# Altium PCB SPLCD V2.0.PcbDoc (part 2 of 2)
Units mm, origin at the board's own origin, x right, y up, seen from the top; angles counter-clockwise.
Board outline 130.07 x 120.05 mm, 4 copper layers (TopLayer, GND, PWR, BottomLayer); 221 components, 137 nets, 665 pads, 261 vias.
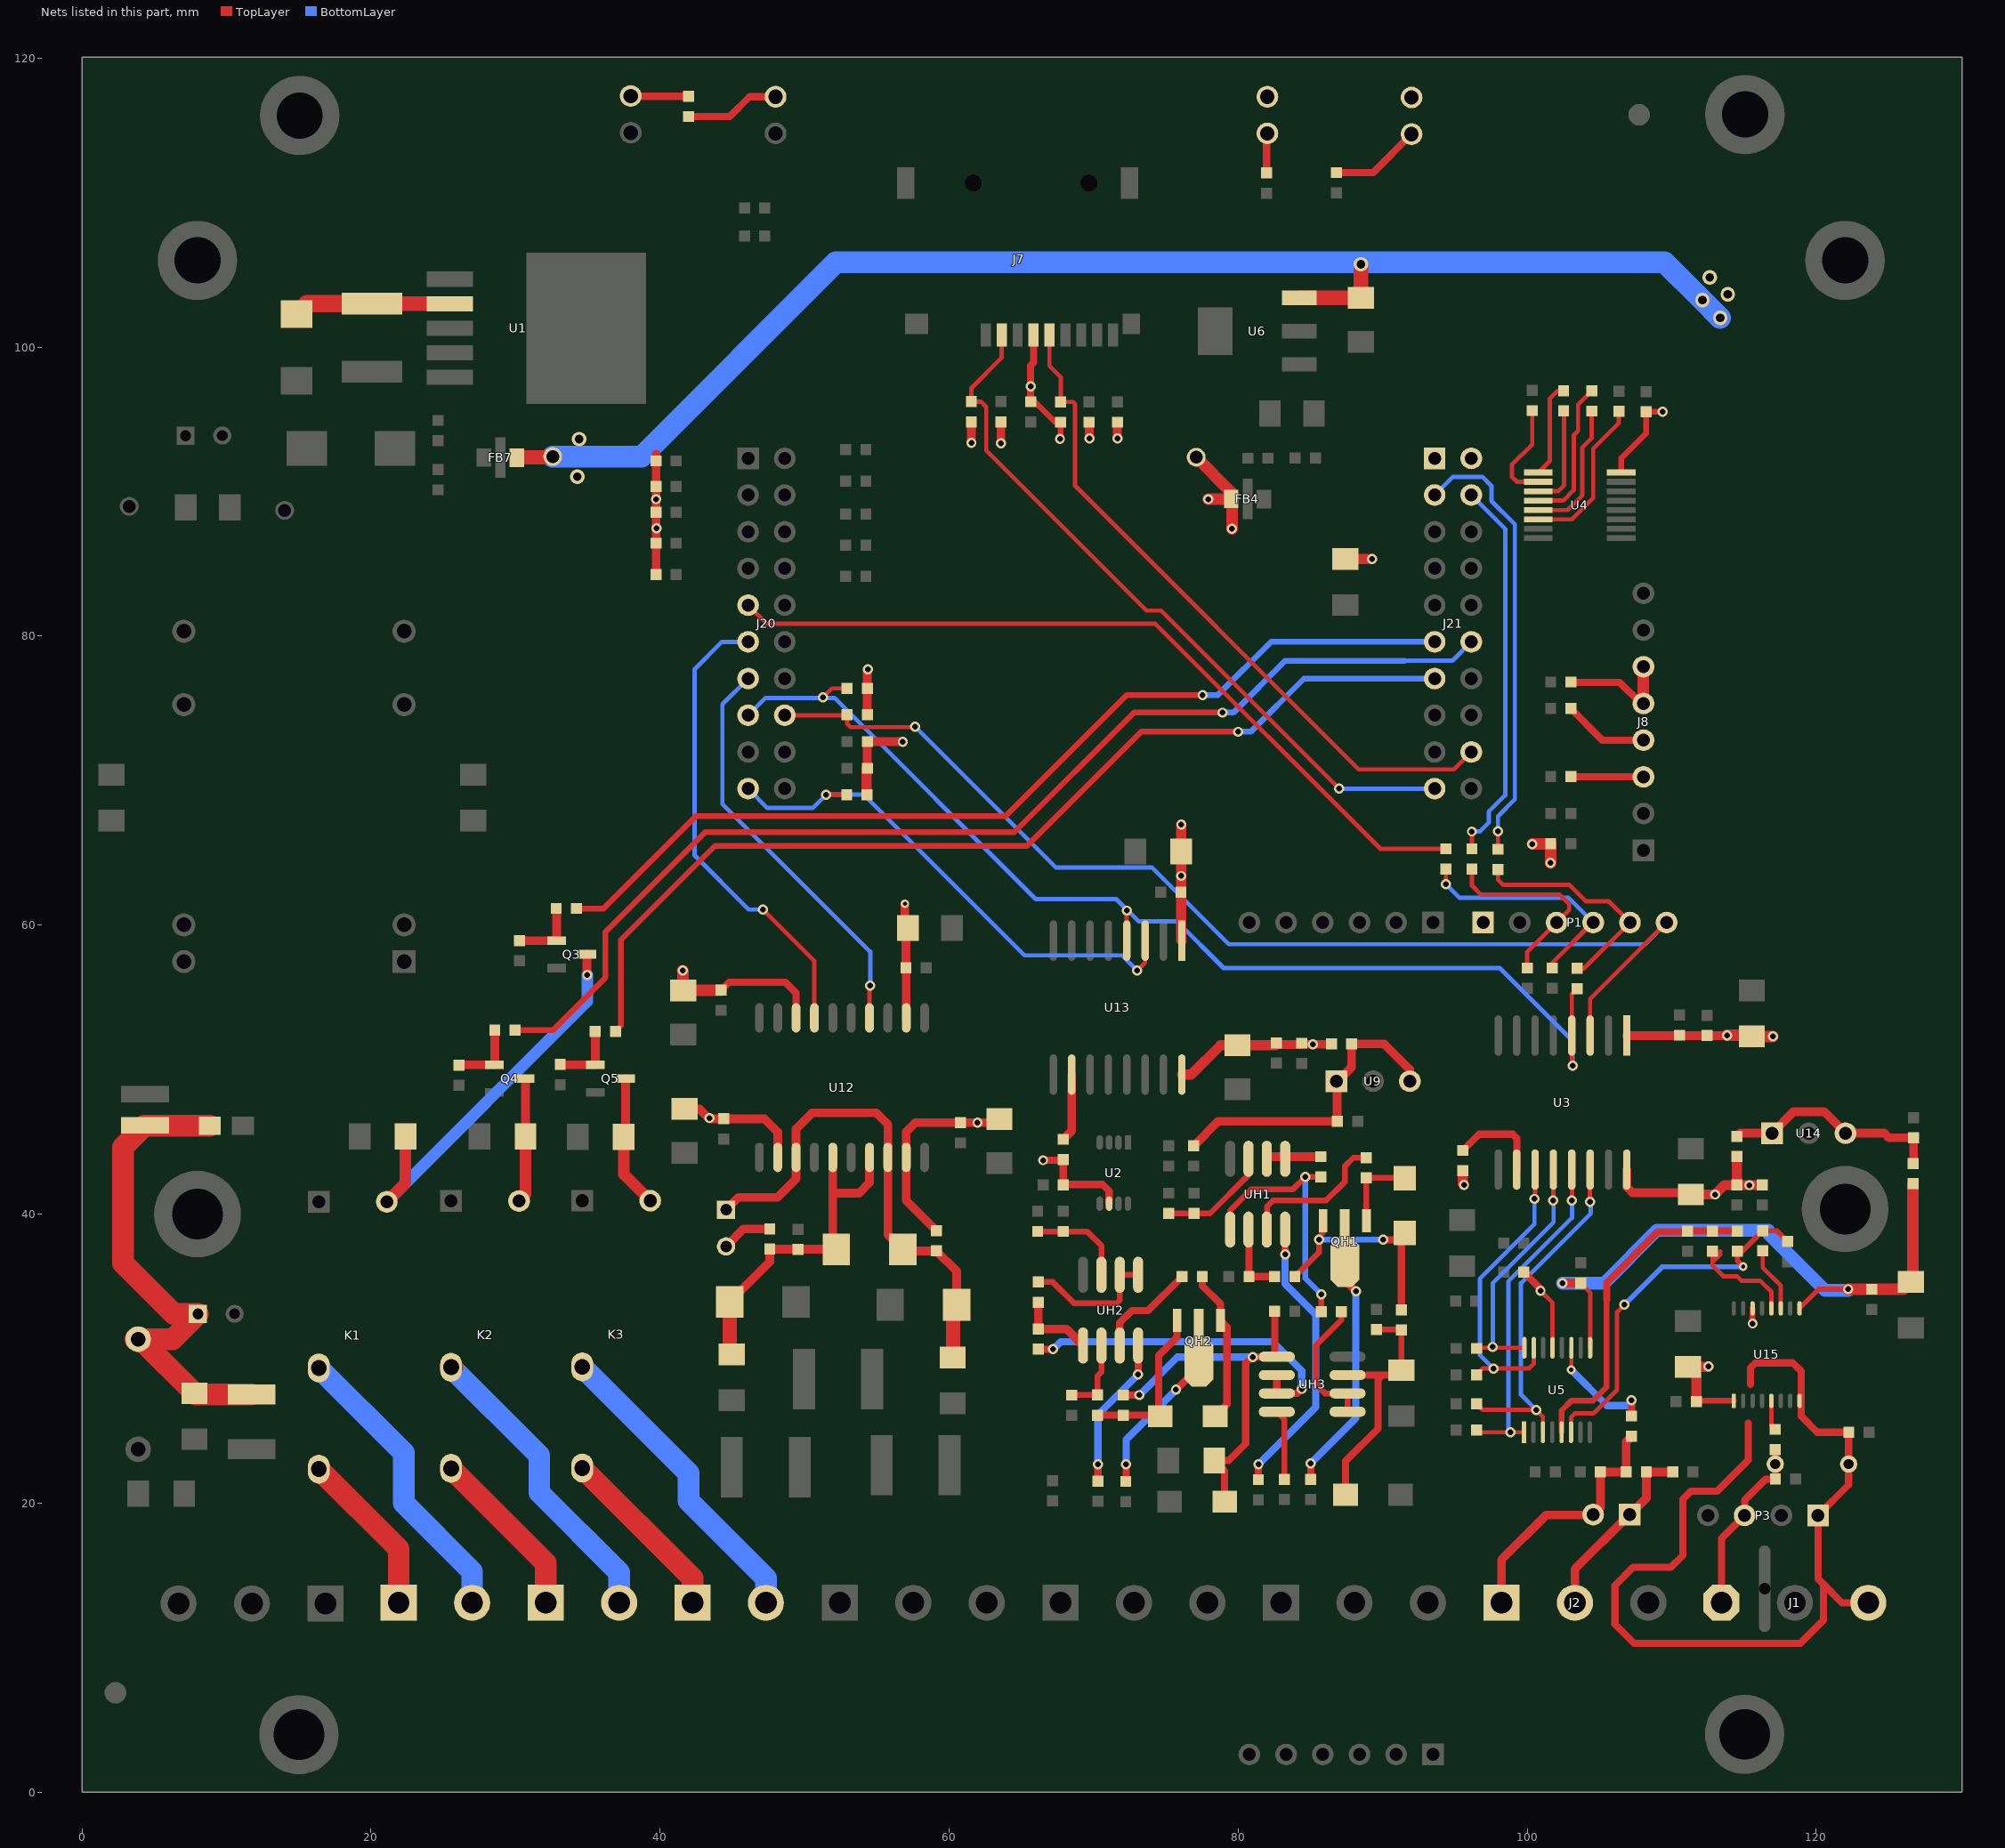
[diagram p4: the nets of this part, all layers, seen from the top]

## Via types
v1: diameter 0.7, hole 0.4, TopLayer to BottomLayer, 219 vias
v2: diameter 1, hole 0.6, TopLayer to BottomLayer, 36 vias
v3: diameter 0.6, hole 0.3, TopLayer to BottomLayer, 6 vias

## Nets (pads, with @x,y where several pads share a name; then routed paths per layer and width w, separated by ;. In a path a pad name is that pad's centre, name@x,y a point inside that pad or via, vN(x,y) a via of type N, cw(c..) or ccw(c..) an arc to the next point about the centre after c; other vN are vias at no path point) (continued)
NetC20_1: C20.1 FB6.1 R16.1 U14.1 U14.3 | length 15.4
  TopLayer w0.6: R16.1@114.52,45.375 114.745,45.6 U14.1@116.945,45.6 118.42,47.075 120.55,47.075 U14.3@122.025,45.6 124.707,45.6 125.032,45.275 C20.1@126.725,45.275 126.725,43.525 FB6.1@126.7,43.5
NetC26_1: C26.1 U4.1 | length 6.6
  TopLayer w0.3: U4.1@100.769,91.325 101.569,92.125 101.569,96.45 102.094,96.975 C26.1@102.519,96.975
NetC26_2: C26.2 U4.3 | length 7.1
  TopLayer w0.3: U4.3@100.769,90.025 102.144,90.025 102.544,90.425 102.544,95.553 C26.2@102.519,95.578
NetC28_1: C28.1 U4.2 | length 7.1
  TopLayer w0.3: C28.1@100.344,95.6 100.344,93.25 98.944,91.85 98.944,91.025 99.294,90.675 U4.2@100.769,90.675
NetC29_2: C29.2 C30.1 R20.2 U5.5 | length 23
  TopLayer w0.4: U5.5@102.384,24.904 102.384,26.409 103.075,27.1 104.57,27.1 105.495,28.025 105.495,34.075
  TopLayer w0.5: 105.495,34.075 105.495,35.245 109.025,38.775 C29.2@111.094,38.775 ; C29.2@111.094,38.822 111.097,38.825 C30.1@114.544,38.825
NetC30_2: C30.2 C31.1 R25.2 U5.6 | length 26
  TopLayer w0.3: U5.6@103.034,24.904 103.034,25.939 103.295,26.2 104.581,26.2 106.22,27.839 106.22,33.225 v1(106.72,33.725)
  TopLayer w0.35: v3(114.944,36.375) 114.544,36.775 C30.2@114.544,37.428 114.875,37.428 R25.2@116.294,38.847 117.272,38.847 C31.1@118.019,38.1 C31.1@118.016,38.097
  BottomLayer w0.35: v1(106.72,33.725) 109.345,36.35 v3@114.944,36.35
NetC39_1: C39.1 U4.5 | length 9.6
  TopLayer w0.3: U4.5@100.769,88.725 102.794,88.725 103.819,89.75 103.819,93.05 104.469,93.7 C39.1@104.469,95.575 C39.1@104.494,95.55
NetC39_2: C39.2 U4.4 | length 10.1
  TopLayer w0.3: U4.4@100.769,89.375 102.494,89.375 103.219,90.1 103.219,93.9 103.519,94.2 103.519,96.022 C39.2@104.469,96.972
NetC40_1: C40.1 U4.6 | length 11.1
  TopLayer w0.3: U4.6@100.769,88.075 103.094,88.075 104.569,89.55 104.569,92.975 106.344,94.75 C40.1@106.344,95.55
NetC41_1: C41.1 CA11.1 D3.2 F3.2 L3.1 VR1.1 | length 35.5
  TopLayer w1.5: D3.2@3.695,31.345 D3.2@3.895,31.345 D3.2@4.048,31.345 ; VR1.1@7.795,27.598 D3.2@4.048,31.345 ; VR1.1@7.868,27.525 F3.2@11.745,27.525 ; C41.1@8.854,46.108 4.327,46.108 2.85,44.63 2.85,36.6 6.359,33.091 CA11.1@8.026,33.091 6.279,31.345 D3.2@4.048,31.345
NetC54_1: C54.1 FB2.1 R19.1 U9.1 U9.3 | length 22
  TopLayer w0.6: FB2.1@76.925,44.725 78.625,46.425 C54.1@86.875,46.425 86.85,46.45 86.85,49.15 87.85,50.15 R19.1@87.85,51.775 90.125,51.775 91.88,50.02 U9.3@91.88,49.2
NetCH1_2: CH1.2 RH1.1 UH1.3 | length 7.7
  TopLayer w0.4: RH1.1@75.2,40.05 76.947,40.05 CH1.2@76.95,40.053 78.053,40.053 80.715,42.715 UH1.3@80.715,43.825
NetCH2_1: CH2.1 CH3.2 DH1.1 RH9.2 UH3.3 | length 17.7
  TopLayer w0.4: CH3.2@89.575,32.003 91.275,32.003 RH9.2@91.3,31.978 ; CH2.1@91.3,29.198 RH9.2@91.3,31.978 ; RH9.2@91.3,32.003 RH9.2@91.3,31.978
  TopLayer w0.5: DH1.1@87.435,20.578 87.435,22.91 89.675,25.15 89.675,28.56 89.975,28.86 ; UH3.3@87.575,28.86 89.975,28.86 ; CH2.1@91.3,29.198 90.962,28.86 89.975,28.86
NetCH4_2: CH4.2 RH11.1 UH2.3 | length 6.8
  TopLayer w0.4: CH4.2@66.125,38.803 66.128,38.8 RH11.1@67.9,38.8 69.55,38.8 70.54,37.81 UH2.3@70.54,35.8
NetCH5_1: CH5.1 CH6.2 DH3.1 RH18.2 UH3.5 | length 26.8
  TopLayer w0.5: RH18.2@72.05,27.472 v1(73.172,27.472) ; DH3.1@79.065,20.097 79.065,22.233 CH5.1@78.348,22.95 79.35,22.95 80.525,24.125 80.525,29.675 80.98,30.13 UH3.5@82.675,30.13 ; UH3.5@82.528,30.277 CH6.2@82.528,33.275
  BottomLayer w0.5: v1(73.172,27.472) 75.8,30.1 v1(81.025,30.1)
NetD1_2: D1.2 L1.1 U1.2 | length 10.9
  TopLayer w1: L1.1@20.075,103 U1.2@25.45,103
  TopLayer w1.2: D1.2@14.85,102.275 15.575,103 L1.1@20.075,103
NetD7_1: D7.1 K1.3 Q3.3 | length 27.9
  TopLayer w0.6: Q3.3@34.944,57.975 34.944,56.575 v1(34.969,56.55)
  TopLayer w0.8: K1.3@21.094,40.85 22.392,42.148 D7.1@22.392,45.375
  BottomLayer w0.8: K1.3@21.094,40.85 34.969,54.725 v1(34.969,56.55)
NetD8_1: D8.1 K2.3 Q4.3 | length 8.7
  TopLayer w0.6: Q4.3@30.644,49.375 30.692,49.327 D8.1@30.692,45.375
  TopLayer w0.8: K2.3@30.244,40.9 30.692,41.348 D8.1@30.692,45.375
NetD10_1: D10.1 K3.3 Q5.3 | length 9.3
  TopLayer w0.6: D10.1@37.619,45.477 Q5.3@37.619,49.375
  TopLayer w0.8: D10.1@37.619,45.477 D10.1@37.492,45.35 37.492,42.752 K3.3@39.32,40.925
NetDH2_1: DH2.1 QH1.3 RH8.2 RH9.1 | length 15.9
  TopLayer w0.4: RH8.2@83.922,35.675 85.6,37.353 v1(85.6,38.225) 85.6,38.45 85.875,38.725 QH1.3@85.875,39.55
  TopLayer w0.5: v1(90.025,38.225) 91.063,38.225 DH2.1@91.3,38.462 ; RH9.1@91.3,33.375 DH2.1@91.3,38.462 ; DH2.1@91.522,38.685 DH2.1@91.3,38.462
  BottomLayer w0.4: v1(85.6,38.225) v1(90.025,38.225)
NetDH2_2: DH2.2 QH1.1 RH7.2 | length 5.6
  TopLayer w0.4: QH1.1@88.875,39.55 RH7.2@88.875,42.503 91.504,42.503 DH2.2@91.522,42.485
NetDH4_1: DH4.1 QH2.3 RH17.2 RH18.1 | length 11.5
  TopLayer w0.5: RH17.2@70.275,26.078 70.278,26.075 RH18.1@72.05,26.075 74.537,26.075 DH4.1@74.61,26.002 ; DH4.1@74.5,26.075 74.5,30.2 75.775,31.475 QH2.3@75.775,32.65
NetDH4_2: DH4.2 QH2.1 RH16.2 | length 10.7
  TopLayer w0.5: RH16.2@77.522,35.675 77.522,35.028 78.775,33.775 QH2.1@78.775,32.65 79.225,32.2 79.225,26.818 DH4.2@78.41,26.002
NetF10_1: F10.1 R41.2 T1.1 U12.13 U12.18 ZD14.1 ZD15.1 | length 36.2
  TopLayer w0.6: T1.1@44.569,40.3 45.419,41.15 48.119,41.15 49.415,42.445 U12.13@49.415,43.923 49.415,45.895 50.52,47 54.974,47 55.765,46.209 U12.18@55.765,43.923 55.765,38.58 ZD14.1@56.794,37.55 56.891,37.453 R41.2@59.119,37.453 60.519,36.053 ZD15.1@60.519,33.725 ; F10.1@60.285,29.74 F10.1@60.285,30.09
  TopLayer w1: F10.1@60.285,30.09 60.285,33.491 ZD15.1@60.519,33.725
NetF11_1: F11.1 R42.1 R76.1 U12.15 U12.17 ZD14.2 ZD16.2 | length 24.1
  TopLayer w0.6: ZD16.2@44.82,33.925 47.594,36.7 R76.1@47.594,37.575 ZD14.2@52.17,37.575 ; U12.15@51.955,43.923 51.955,41.45 ; ZD14.2@52.195,37.55 ZD14.2@52.17,37.575 ; U12.17@54.495,43.923 54.495,42.175 53.769,41.45 51.955,41.45 ; 51.955,41.45 51.955,37.79 ZD14.2@52.17,37.575
  TopLayer w1: ZD16.2@44.82,33.925 44.82,30.374 F11.1@44.918,30.275
NetJ8_3: J8.3 R32.1 | length 5
  TopLayer w0.5: R32.1@103.066,70.275 J8.3@108.041,70.275 ; J8.3@108.021,70.275 J8.3@108.041,70.255
NetJ8_4: J8.4 R33.1 | length 5.9
  TopLayer w0.5: R33.1@103.025,74.975 105.2,72.8 108.036,72.8 J8.4@108.041,72.795
NetJ8_5: J8.5 J8.6 R34.1 | length 8.2
  TopLayer w0.5: R34.1@103.025,76.8 106.406,76.8 J8.5@107.956,75.25
  TopLayer w0.8: J8.5@108.041,75.335 J8.6@108.041,77.875
  TopLayer w1: J8.5@107.956,75.25 J8.5@108.041,75.335
NetJ9_1: J9.1 K1.7 | length 11.5
  TopLayer w1.5: K1.7@16.394,22.35 21.919,16.825 J9.1@21.919,13.1
NetJ9_2: J9.2 K1.1 | length 20.6
  BottomLayer w1.5: K1.1@16.394,29.35 22.269,23.475 22.269,20 26.999,15.27 J9.2@26.999,13.1
NetJ10_1: J10.1 K2.7 | length 12
  TopLayer w1.5: K2.7@25.544,22.4 32.094,15.85 J10.1@32.094,13.1
NetJ10_2: J10.2 K2.1 | length 21.2
  TopLayer w1.5: K2.1@25.544,29.4 K2.1@25.644,29.4
  BottomLayer w1.5: K2.1@25.544,29.4 31.644,23.3 31.644,20.725 37.174,15.195 J10.2@37.174,13.1
NetJ11_1: J11.1 K3.7 | length 12.5
  TopLayer w1.5: K3.7@34.619,22.425 42.244,14.8 J11.1@42.244,13.1
NetJ11_2: J11.2 K3.1 | length 21.6
  BottomLayer w1.5: K3.1@34.619,29.425 41.969,22.075 41.969,20.15 47.324,14.795 J11.2@47.324,13.1
NetLD1_1: LD1.1 R18.1 | length 4
  TopLayer w0.5: LD1.1@37.969,117.375 37.994,117.35 R18.1@41.969,117.35
NetLD2_2: LD2.2 R36.2 | length 2.8
  TopLayer w0.5: R36.2@81.969,112.047 81.969,114.735 LD2.2@82.019,114.785
NetLD3_2: LD3.2 R37.2 | length 6.3
  TopLayer w0.5: R37.2@86.794,112.072 89.332,112.072 LD3.2@91.995,114.735
NetP1_3: P1.3 R4.2 R13.1 | length 14
  TopLayer w0.3: R4.2@96.175,63.878 96.175,62.725 96.8,62.1 102.25,62.1 102.9,61.45 102.9,61.045 P1.3@102.03,60.175 100,58.145 R13.1@100,57.025
NetP1_4: P1.4 R5.2 R11.1 | length 16.7
  TopLayer w0.3: v1(94.375,62.825) R5.2@94.375,63.878 ; R11.1@101.725,57.025 101.725,57.37 104.55,60.195 P1.4@104.57,60.175
  BottomLayer w0.3: v1(94.375,62.825) 95.3,61.9 102.845,61.9 P1.4@104.57,60.175
NetP1_5: P1.5 R7.2 R8.1 | length 16
  TopLayer w0.3: R7.2@97.975,63.853 97.975,63.15 98.35,62.775 102.925,62.775 104.045,61.655 105.63,61.655 P1.5@107.11,60.175 103.935,57 R8.1@103.45,57
NetQ3_1: Q3.1 R50.1 R51.1 | length 4.8
  TopLayer w0.6: R51.1@30.269,58.925 Q3.1@32.844,58.925 32.844,61.125 R50.1@32.82,61.15
NetQ4_1: Q4.1 R53.1 R54.1 | length 4.6
  TopLayer w0.6: R54.1@26.344,50.3 26.369,50.325 Q4.1@28.544,50.325 28.569,50.35 R53.1@28.569,52.725
NetQ5_1: Q5.1 R55.1 R58.1 | length 4.8
  TopLayer w0.6: R58.1@33.094,50.35 33.119,50.325 Q5.1@35.519,50.325 R55.1@35.519,52.65
NetQH1_2: QH1.2 RH2.2 | length 16.6
  TopLayer w0.5: RH2.2@85.025,21.647 v1(85.025,22.75) ; QH1.2@87.375,36.65 87.375,35.425 v1(88.15,34.65)
  BottomLayer w0.5: v1(85.025,22.75) 88.15,25.875 v1(88.15,34.65)
NetQH2_2: QH2.2 RH12.2 | length 10.3
  TopLayer w0.5: RH12.2@72.225,21.497 72.25,21.522 v1(72.25,22.675) ; v1(75.7,27.85) 77.275,29.425 QH2.2@77.275,29.75
  BottomLayer w0.5: v1(72.25,22.675) 72.25,24.4 v1(75.7,27.85)
NetR2_2: R2.2 U5.11 | length 7.8
  TopLayer w0.3: v3(103.045,29.225) 103.056,29.236 U5.11@103.056,30.746
  TopLayer w0.5: R2.2@107.22,26.022 v1(107.22,27.125)
  BottomLayer w0.5: v3(103.045,29.225) 105.52,26.75 107.22,26.75
NetR20_1: R20.1 U15.12 | length 7.9
  TopLayer w0.3: R20.1@112.819,37.425 112.819,36.672 ; 113.345,37.425 113.345,37.197 112.819,36.672 ; U15.12@116.895,33.475 116.895,34.625 116.144,35.375 114.844,35.375 114.519,35.7 113.569,35.7 112.819,36.45 112.819,36.672
NetR23_1: R23.1 U3.10 | length 6.5
  TopLayer w0.5: R23.1@95.545,44.4 96.67,45.525 98.995,45.525 99.275,45.245 U3.10@99.275,43.079
NetR24_2: R24.2 U15.5 | length 2.1
  TopLayer w0.3: U15.5@116.895,27.075 116.895,25.353 R24.2@117.15,25.097
NetR25_1: R25.1 U15.11 | length 4.5
  TopLayer w0.3: R25.1@116.294,37.45 116.294,36.3 117.545,35.05 U15.11@117.545,33.475
NetR71_2: R71.2 U13.10 | length 4.7
  TopLayer w0.6: R71.2@67.9,45.172 68.485,45.756 U13.10@68.485,49.654
NetR76_2: R76.2 T1.2 | length 3.5
  TopLayer w0.6: T1.2@44.569,37.76 45.781,38.972 R76.2@47.594,38.972
NetRH3_2: RH3.2 UH1.8 | length 19.8
  TopLayer w0.5: RH3.2@81.4,21.622 v1(81.4,22.675) ; v1(83.255,37.22) UH1.8@83.255,38.925
  BottomLayer w0.5: v1(81.4,22.675) 85.375,26.65 85.375,33.05 83.255,35.17 v1(83.255,37.22)
NetRH4_1: RH4.1 RH6.1 UH1.5 | length 18.3
  TopLayer w0.4: UH1.5@79.445,38.925 79.445,40.245 80.925,41.725 83.8,41.725 v1(84.65,42.575) RH6.1@85.725,42.575 ; RH4.1@85.75,33.25 v1(85.75,34.45)
  BottomLayer w0.4: v1(84.65,42.575) 84.65,35.55 v1(85.75,34.45)
NetRH4_2: RH4.2 UH3.1 UH3.2 | length 9.5
  TopLayer w0.4: RH4.2@87.147,33.25 87.147,32.672 85.375,30.9 85.375,28.225 86.01,27.59 UH3.2@87.575,27.59 UH3.1@87.575,26.32
NetRH5_2: RH5.2 UH3.8 | length 4.9
  TopLayer w0.4: UH3.8@82.675,26.32 83.2,25.795 RH5.2@83.2,21.647
NetRH6_2: RH6.2 UH1.1 UH1.2 | length 3.8
  TopLayer w0.6: UH1.2@81.985,43.825 82.132,43.972 RH6.2@85.725,43.972
NetRH7_1: RH7.1 UH1.7 | length 10.5
  TopLayer w0.4: UH1.7@81.985,38.925 81.985,40.51 82.425,40.95 86.1,40.95 87.375,42.225 87.375,43.3 87.975,43.9 RH7.1@88.875,43.9
NetRH8_1: RH8.1 RH10.1 UH1.6 | length 5
  TopLayer w0.5: UH1.6@80.75,38.89 RH10.1@80.75,35.675 RH8.1@82.525,35.675
NetRH13_2: RH13.2 UH2.8 | length 10.5
  TopLayer w0.5: RH13.2@70.3,21.522 v1(70.3,22.675) ; v1@73.08,28.905 UH2.8@73.08,30.9
  BottomLayer w0.5: v1(70.3,22.675) 70.3,26.125 v1(73.075,28.9)
NetRH14_1: RH14.1 RH15.1 UH2.5 | length 5.4
  TopLayer w0.6: RH14.1@66.15,32.05 68.12,32.05 UH2.5@69.27,30.9 ; RH14.1@66.175,32.05 RH15.1@66.175,33.9
NetRH14_2: RH14.2 UH3.6 UH3.7 | length 23.7
  TopLayer w0.5: RH14.2@66.175,30.653 67.197,30.653 v1(67.2,30.65) ; UH3.6@82.675,28.86 UH3.7@82.675,27.59 84.09,27.59 v1(84.4,27.9)
  BottomLayer w0.5: v1(67.2,30.65) 67.725,31.175 82.4,31.175 84.4,29.175 v1(84.4,27.9)
NetRH15_2: RH15.2 UH2.1 UH2.2 | length 9.4
  TopLayer w0.4: RH15.2@66.175,35.297 67.178,35.297 68.653,33.822 71.597,33.822 71.81,34.035 UH2.2@71.81,35.8 UH2.1@73.08,35.8
NetRH16_1: RH16.1 UH2.7 | length 7.2
  TopLayer w0.5: UH2.7@71.81,30.9 71.81,32.485 72.65,33.325 73.775,33.325 RH16.1@76.125,35.675
NetRH17_1: RH17.1 RH19.1 UH2.6 | length 5.3
  TopLayer w0.4: RH19.1@68.475,27.472 70.272,27.472 RH17.1@70.275,27.475 70.275,28.8 70.54,29.065 UH2.6@70.54,30.9
PH-INP: C32.1 C37.1 J1.1 P3.3 R24.1 | length 12.3
  TopLayer w0.5: J1.1@113.444,13.1 113.444,17.549 P3.3@115.045,19.15 115.045,20.195 116.5,21.65 C37.1@117.175,21.65 ; R24.1@117.15,23.45 117.175,23.425 C37.1@117.175,21.675
PH-VCM: C32.2 C36.1 J1.3 P3.1 U15.8 | length 65.5
  TopLayer w0.5: 115.3,25.525 115.3,22.975 113.15,20.825 111.325,20.825 110.775,20.275 110.775,16.375 109.95,15.55 107.325,15.55 106.075,14.3 106.075,11.625 107.4,10.3 118.9,10.3 120.487,11.887 120.487,14.387 ; 115.45,28.2 115.45,29.35 115.8,29.7 118.375,29.7 118.95,29.125 118.95,26.025 120.075,24.9 C36.1@122.25,24.9 122.24,24.89 C32.2@122.24,22.7 122.24,21.265 P3.1@120.125,19.15 120.125,14.75 120.487,14.387 ; J1.3@123.604,13.1 121.775,13.1 120.487,14.387
REF2.5V: C33.1 C34.1 C35.1 FB6.2 U5.9 U15.9 | length 44.2
  TopLayer w0.3: C35.1@103.695,35.225 104.356,34.564 U5.9@104.356,30.746
  TopLayer w0.35: U15.9@118.845,33.475 120.169,34.8 v1(122.2,34.8)
  TopLayer w0.6: v1(102.445,35.225) C35.1@103.695,35.225
  TopLayer w0.8: v1(122.2,34.8) C33.1@123.85,34.8 126.052,34.8 C34.1@126.55,35.298 126.7,35.448 FB6.2@126.7,42.103
  BottomLayer w0.9: v1(102.445,35.225) 105.325,35.225 108.975,38.875 116.7,38.875 ; 116.7,38.625 120.6,34.725 v1@122.2,34.725
REL1_CON: J21.11 R50.2 | length 67
  TopLayer w0.4: R50.2@34.217,61.15 36.1,61.15 42.475,67.525 63.894,67.525 72.294,75.925 v1(77.55,75.925)
  BottomLayer w0.4: v1(77.55,75.925) 78.6,75.925 82.275,79.6 J21.11@93.594,79.6
REL2_CON: J21.12 R53.2 | length 79.2
  TopLayer w0.4: R53.2@29.966,52.725 32.6,52.725 36.225,56.35 36.225,59.525 43.125,66.425 64.519,66.425 72.794,74.7 v1(78.925,74.7)
  BottomLayer w0.3: 91.525,78.3 94.835,78.3 J21.12@96.134,79.6
  BottomLayer w0.4: v1(78.925,74.7) 79.669,74.7 83.269,78.3 91.525,78.3
RS485IN_DE: J20.9 R5.1 | length 55.3
  TopLayer w0.3: J20.9@46.094,82.14 47.384,80.85 74.275,80.85 89.85,65.275 R5.1@94.375,65.275
RS485IN_RX: J21.3 R7.1 | length 31
  TopLayer w0.3: R7.1@97.975,65.25 v1(97.975,66.5)
  BottomLayer w0.3: J21.3@93.594,89.76 94.86,91.025 96.9,91.025 97.525,90.4 97.525,89.35 99.15,87.725 99.15,68.7 97.975,67.525 v1(97.975,66.5)
RS485IN_TX: J21.4 R4.1 | length 26.7
  TopLayer w0.3: R4.1@96.175,65.275 v1(96.175,66.475)
  BottomLayer w0.3: J21.4@96.134,89.76 98.475,87.419 98.475,68.975 97.338,67.837 97.338,67.088 96.725,66.475 v1(96.175,66.475)
RX485: J20.13 U12.4 | length 28.5
  TopLayer w0.3: U12.4@54.544,53.625 U12.4@54.495,53.575 54.495,55.75 v1(54.544,55.8)
  BottomLayer w0.3: J20.13@46.094,77.06 44.319,75.285 44.319,68.381 54.544,58.156 v1(54.544,55.8)
SCK1: J20.15 R8.2 R40.2 U3.4 U13.4 | length 78.7
  TopLayer w0.3: v1(51.269,75.75) 51.894,76.375 R40.2@52.947,76.375 ; U13.4@72.295,58.925 v1@72.295,61.075 ; v1(103.15,50.275) 103.085,50.34 U3.4@103.085,52.35 103.085,55.238 R8.2@103.45,55.603
  BottomLayer w0.3: J20.15@46.094,74.52 47.3,75.725 52.069,75.725 65.994,61.8 71.575,61.8 73.125,60.25 75.775,60.25 79,57.025 98.1,57.025 103.15,51.975 v1(103.15,50.275)
  other v1: 72.3,61
SCK2: J7.5 J21.18 R15.1 | length 47.7
  TopLayer w0.3: J7.5@66.944,100.85 66.944,98.7 67.719,97.925 R15.1@67.719,96.2 68.569,96.2 68.719,96.05 68.719,90.4 88.344,70.775 94.93,70.775 J21.18@96.134,71.98
SPI_CS: R6.2 U3.14 U5.3 | length 25.2
  TopLayer w0.3: R6.2@96.492,26.875 96.917,26.45 v1(100.62,26.45) 101.084,25.986 U5.3@101.084,24.904 ; v1@104.345,40.75 104.345,43.069 U3.14@104.355,43.079
  BottomLayer w0.3: v1(100.62,26.45) 99.57,27.5 99.57,35.225 104.4,40.055 v1@104.4,40.85
  other v1: 104.345,40.85
SPI_DIN: R10.2 U3.12 U5.16 | length 17.4
  TopLayer w0.3: R10.2@96.492,30.7 96.538,30.746 U5.16@99.806,30.746 ; v1@101.815,40.87 U3.12@101.815,43.079
  BottomLayer w0.3: v1(97.62,30.8) 97.62,35.225 101.825,39.43 v1@101.825,40.95
  other v1: 101.795,40.95
SPI_DOUT: R12.2 U3.11 U5.15 | length 21.2
  TopLayer w0.3: R12.2@96.492,28.875 96.942,29.325 100.145,29.325 100.456,29.636 U5.15@100.456,30.746 ; v1@100.545,41 U3.11@100.545,43.079
  BottomLayer w0.3: v1(97.67,29.3) 96.72,30.25 96.72,35.525 100.5,39.305 v1@100.5,41.05
  other v1: 100.495,41.05
SPI_SCLK: R9.2 U3.13 U5.1 | length 23.5
  TopLayer w0.3: R9.2@96.492,25.05 96.638,24.904 v1(98.845,24.904) U5.1@99.784,24.904 ; U3.13@103.085,43.079 103.095,43.069 v1@103.095,40.85
  BottomLayer w0.3: v1(98.845,24.904) 98.695,25.054 98.695,35.325 103.1,39.73 v1@103.1,40.95
  other v1: 103.095,40.95
SSEL1: J20.16 P1.6 R35.2 U3.3 | length 78.6
  TopLayer w0.3: J20.16@48.634,74.52 52.917,74.52 R35.2@52.947,74.55 52.947,73.947 53.194,73.7 57.619,73.7 v1(57.644,73.725) ; U3.3@104.355,52.35 104.355,54.879 P1.6@109.65,60.175
  BottomLayer w0.3: v1(57.644,73.725) 67.394,63.975 74.05,63.975 79.35,58.675 108.15,58.675 P1.6@109.65,60.175
SSEL1_A: J20.19 R30.1 U13.3 | length 36.6
  TopLayer w0.3: v1(51.5,69.025) R30.1@52.9,69.025 ; v1(73.019,56.85) 73.565,57.395 U13.3@73.565,58.925
  BottomLayer w0.3: J20.19@46.094,69.44 47.434,68.1 50.575,68.1 v1(51.5,69.025) 54.1,69.025 65.225,57.9 71.969,57.9 v1(73.019,56.85)
SSEL2: J7.2 J21.19 R26.1 | length 50.4
  TopLayer w0.3: J7.2@63.644,100.85 63.644,99.275 61.544,97.175 R26.1@61.544,96.225 62.194,96.225 62.569,95.85 62.569,92.85 73.655,81.765 74.669,81.765 v1(86.994,69.44)
  BottomLayer w0.3: v1(86.994,69.44) J21.19@93.594,69.44
TIMER_CON: J21.13 R55.2 | length 70.3
  TopLayer w0.4: R55.2@36.916,52.65 37.3,53.034 37.3,58.975 43.8,65.475 65.394,65.475 73.294,73.375 v1(80,73.375)
  BottomLayer w0.4: v1(80,73.375) 80.869,73.375 84.554,77.06 J21.13@93.594,77.06
TP-IN+: J2.1 P2.2 R2.1 R3.1 R21.2 | length 18.2
  TopLayer w0.6: J2.1@98.219,13.1 98.219,16.069 101.325,19.175 104.535,19.175 105.07,19.71 R3.1@105.07,22.15 R21.2@106.848,22.15 106.848,24.253 R2.1@107.22,24.625
TP-IN-: J2.2 P2.1 R21.1 R22.1 | length 12.8
  TopLayer w0.6: J2.2@103.299,13.1 103.299,15.424 P2.1@106.988,19.112 ; P2.1@107.1,19.2 108.245,20.345 R21.1@108.245,22.15 R22.1@110.07,22.15
TX485: J20.11 U12.7 | length 32.6
  TopLayer w0.3: v1(47.125,61.075) 50.685,57.515 U12.7@50.685,53.575
  BottomLayer w0.3: J20.11@46.094,79.6 44.294,79.6 42.394,77.7 42.394,64.825 46.144,61.075 v1(47.125,61.075)
V330_D: C1.1 C4.2 C9.2 C27.2 C43.1 C44.1 C56.1 CA1.1 CA4.1 CA13.1 CA14.1 D6.2 FB4.2 J7.4 J21.1 J21.2 LD2.1 LD3.1 P1.1 PQ1.1 R1.2 R14.2 R15.2 R17.2 R18.2 R26.2 R30.2 R35.1 R40.1 R43.1 R44.1 R59.2 R60.2 R61.2 R62.2 R63.2 TP5.1 U3.1 U4.16 U12.2 U12.8 U13.1 | length 91.6
  TopLayer w0.4: C4.2@65.644,96.222 65.922,96.222 67.341,94.803 R15.2@67.719,94.803 v1@67.719,93.7 ; U4.16@106.51,91.325 106.51,92.31 108.225,94.025 C27.2@108.225,95.522 v1@109.372,95.522
  TopLayer w0.5: R18.2@41.969,115.953 44.822,115.953 46.194,117.325 PQ1.1@47.994,117.325 ; C44.1@44.225,55.5 44.775,56.05 48.675,56.05 49.415,55.31 U12.8@49.415,53.575 ; C4.2@65.644,96.222 v1(65.644,97.275) 65.644,98.725 65.844,98.925 J7.4@65.844,100.85
  TopLayer w0.6: R63.2@39.722,84.25 R62.2@39.722,86.425 R61.2@39.722,88.575 R60.2@39.722,90.35 39.722,92.6 ; R44.1@54.344,70.85 R43.1@54.344,72.7 v1@56.775,72.7 ; R35.1@54.344,74.55 R40.1@54.344,76.375 v1@54.344,77.65 ; v3(56.945,61.475) 56.945,59.8 57.02,59.725 C43.1@57.02,57.05 ; U12.2@57.035,53.575 C43.1@57.035,57.05 ; v1(61.544,93.375) R26.2@61.544,94.828 ; v1(63.594,93.35) R17.2@63.594,94.828 ; v1@69.694,93.7 R14.2@69.694,94.803 ; v1(71.644,93.675) R1.2@71.644,94.803 ; CA4.1@76.055,65.087 CA4.1@76.068,65.1 ; U3.1@106.895,52.35 106.898,52.353 C9.2@112.445,52.353 114.625,52.353
  TopLayer w0.7: R30.2@54.297,69.025 R44.1@54.297,70.803 ; v1(76.07,66.95) v1(76.07,66.95) CA4.1@76.068,65.1 v1(76.068,63.4) 76.068,58.962 U13.1@76.105,58.925 ; D6.2@87.425,85.327 v1(89.273,85.327)
  TopLayer w0.8: v1(41.575,56.85) 41.6,56.825 CA14.1@41.6,55.48 41.619,55.5 C44.1@44.225,55.5 ; TP5.1@77.1,92.375 79.514,89.961 FB4.2@79.514,89.481 ; v1(77.925,89.473) 79.569,89.473 v1(79.569,87.425) ; v1(113.825,52.37) 115.477,52.37 CA1.1@115.55,52.297 v1(116.998,52.297)
  other v1: 56.8,72.675 54.394,77.7 39.769,87.45 39.722,89.475 67.669,93.65 69.719,93.675 109.375,95.525
V500_A: C7.1 FB5.2 FB7.2 TP6.1 U6.3 | length 99.5
  TopLayer w0.8: v1@100.369,65.625 FB5.2@101.622,65.625 v1@101.622,64.303
  TopLayer w1: FB7.2@30.294,92.364 TP6.1@32.711,92.364 ; U6.3@84.225,103.4 C7.1@88.5,103.4 v2(88.5,105.725)
  BottomLayer w1.5: TP6.1@32.575,92.425 38.725,92.425 52.175,105.875 109.5,105.875 v2(112.125,103.25) v2(113.35,102.025)
  other v1: 101.619,64.3 100.344,65.6
  other v2: 34.275,91.025 34.4,93.625 113.875,103.65 112.625,104.825
VA_ISO: C5.1 C53.1 C57.1 CA5.1 R19.2 R71.1 U2.6 U13.16 | length 18.6
  TopLayer w0.5: v1(66.5,43.725) 67.85,43.725 R71.1@67.9,43.775 C5.1@67.9,42.025 ; C5.1@67.9,42.05 70.625,42.05 71.073,41.602 U2.6@71.073,40.722
  TopLayer w0.6: C57.1@82.644,51.725 C53.1@84.4,51.725 ; C53.1@84.675,51.75 R19.2@86.453,51.75
  TopLayer w0.7: U13.16@76.105,49.654 76.754,49.654 78.775,51.675 82.594,51.675 C57.1@82.644,51.725 ; CA5.1@79.749,51.479 CA5.1@79.944,51.675
  other v1: 85.17,51.75
VCC_COM: C45.1 C46.2 CA15.1 CA16.1 R41.1 U12.12 U12.19 | length 23.5
  TopLayer w0.6: CA15.1@41.695,47.275 42.741,47.275 43.42,46.597 C45.1@44.42,46.597 47.222,46.597 48.145,45.675 U12.12@48.145,43.923 ; R41.1@59.044,38.85 R41.1@59.119,38.85 57.035,40.935 U12.19@57.035,43.923 57.035,45.69 57.67,46.325 C46.2@60.795,46.325 v1(61.97,46.325) 63.225,46.325 CA16.1@63.475,46.575
  other v1: 43.42,46.65
VDD_ISO: C8.1 C24.1 C25.1 C38.1 CA2.1 FB1.1 R16.2 R23.2 U3.16 U5.13 U15.1 U15.14 | length 27.5
  TopLayer w0.3: v1(100.92,34.7) 101.756,33.864 U5.13@101.756,30.746
  TopLayer w0.4: C25.1@111.85,27.075 U15.1@114.295,27.075 ; v1@115.595,32.42 U15.14@115.595,33.475
  TopLayer w0.5: FB1.1@99.77,35.975 100.92,34.825 v1(100.92,34.7)
  TopLayer w0.6: U3.16@106.895,43.079 106.895,41.875 107.291,41.479 CA2.1@111.068,41.479 ; CA2.1@111.193,41.479 CA2.1@111.32,41.352
  TopLayer w0.7: R23.2@95.545,43.003 95.545,42.105 v1(95.625,42.025) ; CA2.1@111.32,41.352 v1(112.995,41.352) 113.643,42 v1(115.375,42) C38.1@116.27,42 ; C25.1@111.7,27.025 111.7,28.847 C24.1@111.12,29.427 112.521,29.427 v1(112.544,29.45) ; C8.1@114.52,42.025 R16.2@114.52,43.978
  other v1: 115.6,32.425
pads on no net: J1.2 J4.3 J7. J7.1 J7.8 J13.1 J13.2 J13.3 J13.4 J13.5 J13.6 P3.2 U3.7 U4.7 U4.8 U4.9 U4.10 U5.2 U5.4 U11.9 U11.11 U13.6 U13.7 U13.11 U15.2 U15.3 U15.6 U15.7

## Polygon pours and split planes (outlines as drawn)
V330_D on TopLayer "Top Layer-No Net" (hatched 90Degree grid 0.2 track 0.3, remove dead copper, pour order 17): 80.025,86.775 80.025,93.9 80,93.925 75.475,93.925 75.425,93.875 75.425,89.65 78.3,86.775
V500_A on TopLayer "Top Layer-No Net" (hatched 90Degree grid 0.2 track 0.3, remove dead copper, pour order 15): 30,94.375 30.05,94.325 35.75,94.325 35.75,90.075 35.7,90.025 30.65,90.025 30,90.675
+24V on TopLayer "Top Layer-No Net" (hatched 90Degree grid 0.2 track 0.3, remove dead copper, pour order 28): 8.65,78.95 8.65,96.075 8.675,96.1 1.35,96.1 1.275,96.175 1.275,78.625 1.35,78.55 8.575,78.55 8.675,78.65
IAGND on TopLayer "Top Layer-No Net" (hatched 90Degree grid 0.2 track 0.3, remove dead copper, pour order 25): 64.85,53.6 92.275,53.6 92.275,22.525 65,22.525 64.875,22.65
GND_ISO on TopLayer "Top Layer-No Net" (hatched 90Degree grid 0.2 track 0.3, remove dead copper, pour order 23): 93.73,47.228 129.205,47.228 129.33,47.35 129.33,30.524 129.38,30.475 114.13,30.475 114.08,30.524 114.08,23.2 112.855,22 99.18,22 94.055,22 93.73,22.319
GND on TopLayer "Top Layer-No Net" (hatched 90Degree grid 0.3 track 0.3, remove dead copper, pour order 20): 6.144,77.198 12.57,77.198 16.002,73.618 16.636,72.957 21.269,72.957 21.269,70.083 20.373,69.148 15.587,69.148 11.762,73.139 11.434,73.481 6.188,73.481
24VGND_IN on TopLayer "Top Layer-No Net" (hatched 90Degree grid 0.3 track 0.3, remove dead copper, pour order 21): 19.694,66.423 19.694,55.298 19.719,55.273 19.719,54.748 19.694,54.723 24.219,54.723 24.219,66.273 24.069,66.423
NetC02_2 on TopLayer "Top Layer-No Net" (hatched 90Degree grid 0.3 track 0.3, remove dead copper, pour order 19): 1.875,47.925 1.9,47.9 7.325,47.9 7.325,52.225 10.1,55 10.725,55.625 10.725,64.75 5.5,64.75 5.475,64.775 5.475,58.8 1.875,55.2
V500_A on BottomLayer "Top Layer-No Net" (hatched 90Degree grid 0.2 track 0.3, remove dead copper, pour order 13): 30.575,94.275 38.125,94.275 42.925,99.075 51.275,107.425 84.725,107.425 111.7,107.425 115.125,104 115.65,103.475 115.65,100.55 112.6,100.55 109.425,103.725 108.75,104.4 100.325,104.4 52.825,104.4 48.75,100.325 38.725,90.3 30.575,90.3
GND_ISO on BottomLayer "Top Layer-No Net" (hatched 90Degree grid 0.2 track 0.3, remove dead copper, pour order 22): 93.95,47.375 129.425,47.375 129.55,47.497 129.55,30.671 129.6,30.622 114.35,30.622 114.3,30.671 114.3,23.348 113.075,22.147 99.4,22.147 94.275,22.147 93.95,22.466
IAGND on BottomLayer "Top Layer-No Net" (hatched 90Degree grid 0.2 track 0.3, remove dead copper, pour order 24): 65,53.625 92.425,53.625 92.425,22.55 65.15,22.55 65.025,22.675
EARTH on BottomLayer "Top Layer-No Net" (hatched 90Degree grid 0.3 track 0.3, remove dead copper, pour order 18): 11.6,9.8 11.6,0.625 11.674,0.55 118.475,0.55 118.5,0.525 118.5,9.775
V500_A on PWR (split plane): 129.565,63.127 99.577,63.127 99.577,68.259 100.066,68.748 114.7,68.748 114.778,68.756 114.854,68.779 114.923,68.816 114.984,68.866 115.034,68.927 115.071,68.996 115.094,69.072 115.102,69.15 115.102,98.4 115.094,98.478 115.071,98.554 115.034,98.623 114.984,98.684 114.923,98.734 114.854,98.771 114.778,98.794 114.7,98.802 110.096,98.802 110.096,119.54 129.565,119.54
VA_ISO on PWR (split plane): 92.373,48.19 92.354,48.154 92.331,48.078 92.323,48 92.323,21.052 64.621,21.052 64.621,47.396 64.644,47.472 64.652,47.55 64.652,53.798 92.373,53.798
VDD_ISO on PWR (split plane): 129.565,0.51 96.121,0.51 96.121,17.775 96.114,17.853 96.091,17.929 96.054,17.998 96.004,18.059 93.129,20.934 93.127,20.936 93.127,47.085 93.146,47.121 93.169,47.197 93.177,47.275 93.177,47.598 129.565,47.598
VCC_COM on PWR (split plane): 63.818,18 63.825,17.922 63.848,17.846 63.885,17.777 63.935,17.716 64.493,17.159 64.493,9.577 50.196,9.577 50.196,16.325 50.189,16.403 50.166,16.479 50.129,16.548 50.079,16.609 41.946,24.741 41.946,47.648 63.818,47.648
V330_D on PWR (split plane): 109.293,98.4 109.3,98.322 109.323,98.246 109.36,98.177 109.41,98.116 109.471,98.066 109.541,98.029 109.616,98.006 109.694,97.998 114.298,97.998 114.298,69.552 99.9,69.552 99.822,69.544 99.764,69.527 99.746,69.521 99.677,69.484 99.616,69.434 98.891,68.709 98.841,68.648 98.804,68.579 98.781,68.503 98.773,68.425 98.773,62.725 98.781,62.647 98.804,62.571 98.841,62.502 98.891,62.441 98.952,62.391 99.021,62.354 99.097,62.331 99.175,62.323 129.565,62.323 129.565,48.402 93.177,48.402 93.177,54.2 93.169,54.278 93.146,54.354 93.109,54.423 93.059,54.484 92.998,54.534 92.929,54.571 92.853,54.594 92.775,54.602 64.25,54.602 64.172,54.594 64.096,54.571 64.027,54.534 63.966,54.484 63.916,54.423 63.879,54.354 63.856,54.278 63.848,54.2 63.848,48.452 41.777,48.452 41.768,48.459 41.698,48.496 41.623,48.519 41.544,48.527 41.466,48.519 41.391,48.496 41.321,48.459 41.26,48.409 41.21,48.348 41.173,48.279 41.15,48.203 41.143,48.125 41.143,34.252 15.246,34.252 15.246,46.384 20.036,51.173 22.619,51.173 22.698,51.181 22.773,51.204 22.843,51.241 22.904,51.291 27.504,55.891 27.554,55.952 27.591,56.021 27.596,56.039 27.614,56.097 27.621,56.175 27.621,64.875 27.825,64.875 27.825,72.525 27.652,72.525 27.652,84.373 35.375,84.373 35.453,84.381 35.529,84.404 35.598,84.441 35.659,84.491 35.709,84.552 35.746,84.621 35.769,84.697 35.777,84.775 35.77,84.85 35.777,84.925 35.777,119.54 109.293,119.54
+24V on PWR (split plane): 34.973,85.177 27.25,85.177 27.172,85.169 27.096,85.146 27.027,85.109 26.966,85.059 26.916,84.998 26.879,84.929 26.856,84.853 26.848,84.775 26.848,72.527 0.51,72.574 0.51,119.54 34.973,119.54
+24V_IN on PWR (split plane): 26.818,56.341 22.453,51.977 19.869,51.977 19.791,51.969 19.733,51.952 19.716,51.946 19.646,51.909 19.585,51.859 14.56,46.834 14.51,46.773 14.473,46.704 14.45,46.628 14.443,46.55 14.443,33.85 14.45,33.772 14.473,33.696 14.51,33.627 14.56,33.566 14.621,33.516 14.691,33.479 14.766,33.456 14.844,33.448 41.143,33.448 41.143,24.575 41.15,24.497 41.173,24.421 41.21,24.352 41.26,24.291 49.393,16.159 49.393,9.25 49.4,9.172 49.423,9.096 49.46,9.027 49.51,8.966 49.585,8.891 49.646,8.841 49.716,8.804 49.791,8.781 49.869,8.773 64.894,8.773 64.973,8.781 65.048,8.804 65.118,8.841 65.179,8.891 65.229,8.952 65.266,9.021 65.289,9.097 65.296,9.175 65.296,17.325 65.289,17.403 65.266,17.479 65.229,17.548 65.179,17.609 64.621,18.166 64.621,20.248 92.678,20.248 95.318,17.609 95.318,0.51 0.51,0.51 0.51,64.851 26.818,64.874
IAGND on GND (split plane): 92.348,48.035 92.331,47.978 92.323,47.9 92.323,21.052 64.596,21.052 64.596,47.036 64.609,47.052 64.646,47.121 64.669,47.197 64.677,47.275 64.677,53.748 92.348,53.748
GND_COM on GND (split plane): 63.793,17.975 63.8,17.897 63.823,17.821 63.86,17.752 63.91,17.691 64.518,17.084 64.518,9.527 50.221,9.527 50.221,16.375 50.214,16.453 50.191,16.529 50.154,16.598 50.104,16.659 42.071,24.691 42.071,47.673 63.793,47.673
GND_ISO on GND (split plane): 129.565,0.51 96.121,0.51 96.121,17.7 96.114,17.778 96.091,17.854 96.054,17.923 96.004,17.984 93.127,20.861 93.127,47.11 93.146,47.146 93.169,47.222 93.177,47.3 93.169,47.378 93.152,47.435 93.152,47.673 129.565,47.673
GND on GND (split plane): 129.565,48.477 93.152,48.477 93.152,54.15 93.144,54.228 93.121,54.304 93.084,54.373 93.034,54.434 92.973,54.484 92.904,54.521 92.828,54.544 92.75,54.552 64.275,54.552 64.197,54.544 64.121,54.521 64.052,54.484 63.991,54.434 63.941,54.373 63.904,54.304 63.881,54.228 63.873,54.15 63.873,48.477 41.902,48.477 41.893,48.484 41.823,48.521 41.748,48.544 41.669,48.552 41.591,48.544 41.516,48.521 41.446,48.484 41.385,48.434 41.335,48.373 41.298,48.304 41.275,48.228 41.268,48.15 41.268,34.202 15.271,34.202 15.271,46.309 20.136,51.173 22.594,51.173 22.673,51.181 22.748,51.204 22.818,51.241 22.879,51.291 27.504,55.916 27.554,55.977 27.591,56.046 27.614,56.122 27.621,56.2 27.621,64.875 27.9,64.875 27.875,72.5 0.51,72.524 0.51,119.54 34.848,119.54 34.848,107.65 34.856,107.572 34.879,107.496 34.916,107.427 34.966,107.366 35.027,107.316 35.096,107.279 35.172,107.256 35.25,107.248 40.273,107.248 40.273,94.227 35.3,94.227 35.222,94.219 35.146,94.196 35.077,94.159 35.016,94.109 34.966,94.048 34.929,93.979 34.906,93.903 34.898,93.825 34.898,77.025 34.906,76.947 34.929,76.871 34.966,76.802 35.016,76.741 35.077,76.691 35.146,76.654 35.222,76.631 35.3,76.623 35.378,76.631 35.454,76.654 35.523,76.691 35.584,76.741 35.634,76.802 35.671,76.871 35.694,76.947 35.702,77.025 35.702,93.423 40.675,93.423 40.753,93.431 40.829,93.454 40.898,93.491 40.959,93.541 41.009,93.602 41.046,93.671 41.069,93.747 41.077,93.825 41.077,107.65 41.069,107.728 41.046,107.804 41.009,107.873 40.959,107.934 40.898,107.984 40.829,108.021 40.753,108.044 40.675,108.052 35.652,108.052 35.652,112.84 35.669,112.897 35.677,112.975 35.677,119.54 129.565,119.54
24VGND_IN on GND (split plane): 26.818,64.875 26.818,56.366 22.428,51.977 19.969,51.977 19.891,51.969 19.833,51.952 19.816,51.946 19.746,51.909 19.685,51.859 14.585,46.759 14.535,46.698 14.498,46.629 14.475,46.553 14.468,46.475 14.468,33.8 14.475,33.722 14.498,33.646 14.535,33.577 14.585,33.516 14.646,33.466 14.716,33.429 14.791,33.406 14.869,33.398 41.268,33.398 41.268,24.525 41.275,24.447 41.298,24.371 41.335,24.302 41.385,24.241 49.418,16.209 49.418,9.125 49.425,9.047 49.448,8.971 49.485,8.902 49.535,8.841 49.596,8.791 49.666,8.754 49.741,8.731 49.819,8.723 64.919,8.723 64.998,8.731 65.073,8.754 65.143,8.791 65.204,8.841 65.254,8.902 65.291,8.971 65.314,9.047 65.321,9.125 65.321,17.25 65.314,17.328 65.296,17.386 65.291,17.404 65.254,17.473 65.204,17.534 64.596,18.141 64.596,20.248 92.603,20.248 95.318,17.534 95.318,0.51 0.51,0.51 0.51,64.875

## Keep-outs
KeepOutLayer:
  lines w0.5: 7.919,109.35 6.875,109.35 3.65,106.125 0,106.125 0,4.975 6.8,4.975 cw(c6.7,0.15) 11.525,0.05 118.525,0.05 ; 8.081,109.35 ccw(c8.094,113.21) 11.954,113.197 ; 11.975,113.21 11.975,120.075 118.075,120.075 118.075,113.101 ccw(c121.988,113.088) 121.975,109.175 123.2,109.175 126.25,106.125 130.125,106.125 130.125,5.025 123.45,5.025 ccw(c123.462,0.062) 118.5,0.05 ; 52.147,119.997 56.094,116.05 73.269,116.05 77.247,120.028 ; 130.1,61.7 128.975,62.825 126.25,62.825 125.4,63.675 125.4,84.475 126.25,85.325 128.95,85.325 130.162,86.538

## Other copper
GND (plane layer: these items are gaps in the copper):
  pour cut-out: 105.85,16.775 110.6,16.775 110.6,20.85 110.625,20.875 112.85,20.875 114.925,22.95 114.925,29.775 114.9,29.8 125.775,29.8 125.8,10.075 105.95,10.05 105.875,10.125
  pour cut-out: -0.368,72.525 27.875,72.5 27.9,64.875 -0.368,64.875
  lines w0.8: 0.025,67.975 27.219,67.975 27.219,56.2 22.594,51.575 19.969,51.575 14.869,46.475 14.869,33.8 41.644,33.8 ; 35.25,120.075 35.25,107.65 40.675,107.65 40.675,93.825 35.3,93.825 35.3,77.025 ; 35.275,112.975 35.275,120 ; 41.669,48.075 64.275,48.075 ; 41.669,48.15 41.669,24.525 49.819,16.375 49.819,9.125 64.919,9.125 64.919,17.25 64.194,17.975 64.194,48.15 ; 64.275,47.275 64.275,54.15 92.75,54.15 92.75,47.325 92.775,47.3 ; 64.344,20.65 92.725,20.65 92.725,47.9 ; 92.725,20.694 95.719,17.7 95.719,0.15 ; 92.775,48.075 130.15,48.075
PWR (plane layer: these items are gaps in the copper):
  pour cut-out: 105.925,16.738 110.675,16.738 110.675,20.812 110.7,20.837 112.925,20.837 115,22.912 115,29.738 114.975,29.763 125.85,29.762 125.875,10.037 106.025,10.012 105.95,10.088
  pour cut-out: -0.243,72.575 27.825,72.525 27.825,64.875 -0.243,64.85
  lines w0.8: 0.05,67.875 27.219,67.875 27.219,56.175 22.619,51.575 19.869,51.575 14.844,46.55 14.844,33.85 41.544,33.85 ; 27.25,67 27.25,84.775 35.375,84.775 ; 35.375,84.925 35.375,120.05 ; 41.544,48.125 41.544,24.575 49.794,16.325 49.794,9.25 49.869,9.175 64.894,9.175 64.894,17.325 64.219,18 64.219,48.05 41.619,48.05 ; 64.25,47.55 64.25,54.2 92.775,54.2 92.775,47.275 ; 64.369,20.65 92.844,20.65 95.719,17.775 95.719,0.05 ; 92.725,20.825 92.725,48 129.85,48 ; 109.694,120 109.694,98.4 114.7,98.4 114.7,69.15 99.9,69.15 99.175,68.425 99.175,62.725 115.55,62.725 ; 115.369,62.725 130.15,62.725

## Silkscreen, mask and mechanical layers (free items; w line width, h text height)
TopOverlay:
  lines w0.2: 109.311,63.905 115.189,63.905 115.244,63.96 115.244,84.225 109.311,84.225 ; 115.219,65.775 113.219,65.775 113.219,66.725 115.244,66.725 ; 115.244,81.6 113.194,81.6 113.194,82.625 115.244,82.625
  lines w0.254: 85.547,50.375 cw(c89.298,49.067) 93.072,50.304 ; 115.728,46.872 cw(c119.479,45.564) 123.253,46.801
  lines w0.3: 64.025,16.8 64.025,54.225 93.175,54.225 93.175,16.725 ; 26.52,116.85 27.77,118.1 29.095,116.775 28.27,116.775 28.22,116.725 28.22,111.85 27.295,111.85 27.27,111.875 27.27,116.85 26.52,116.85
  lines w0.4: 20.475,8.625 20.475,6.575 21.5,6.575 ; 26.65,6.575 27.95,6.575 27.95,8.775 ; 30.75,8.7 30.75,6.575 31.775,6.575 ; 36.925,6.575 38.225,6.575 38.225,8.675 ; 40.975,8.675 40.975,6.6 41.6,6.6 ; 47.825,6.6 48.45,6.6 48.45,8.65 ; 56.1,7.725 56.1,8.8 ; 63.75,7.7 63.75,8.825 ; 71.125,7.425 71.125,8.825 ; 78.7,7.65 78.7,8.725 ; 81.6,7.375 81.6,8.775 ; 89.175,7.6 89.175,8.775 ; 45.419,94.975 46.007,94.388 46.594,94.975 45.419,94.975 ; 92.969,94.95 93.557,94.363 94.144,94.95 92.969,94.95
  text "Sanpell_SP3110_V2.0 2019.05" at 75.475,106.425 h1.5
  text "GND" at 103.75,82.475 h1
  text "GND" at 103.775,80.025 h1
  text "TX" at 104.45,77.325 h1
  text "TX" at 104.475,74.9 h1
  text "RX" at 104.6,72.3 h1
  text "BY" at 104.625,69.825 h1
  text "VCC" at 103.925,67.225 h1
  text "VCC" at 103.925,64.625 h1
  text "LCD" at 112.425,62.25 h1
  text "KEY" at 81.475,62.2 h1
  text "NC" at 117.169,7.2 h1.5
  text "GUARD" at 105,7.125 h1.5
  text "INP" at 112.45,7.125 h1.5
  text "VCM" at 121.6,7.125 h1.5
  text "PE" at 4.7,7.075 h1.5
  text "+24V" at 8.45,7.075 h1.5
  text "GND" at 14.925,7.075 h1.5
  text "+B(mA)-" at 70.22,6 h1.5
  text "-A(mA)+" at 80.644,5.975 h1.5
  text "PE" at 66.55,5.925 h1.5
  text "T+" at 97.345,5.925 h1.5
  text "T-" at 102.12,5.925 h1.5
  text "REL1" at 22.045,5.8 h1.5
  text "REL2" at 32.144,5.8 h1.5
  text "WASH" at 41.869,5.8 h1.5
  text "PE" at 51.294,5.8 h1.5
  text "B(485)A" at 55.894,5.8 h1.5
  text "NC" at 92.369,5.8 h1.5
Mechanical1:
  lines w0.2: 107.075,20.98 107.075,64.3
  lines w0.25: -0.925,120.05 126.725,120.05 ; 75.219,60.175 138.875,60.175 ; 130.075,0.5 130.075,128.9
  lines w0.254: 102.095,19.175 137.125,19.175
  lines w0.3: -12.181,40.1 134.519,40.1 ; -6.8,4.975 132.125,4.975 ; -4.806,116.1 131.744,116.1 ; -2.806,0 132.044,0 ; -2.606,108.575 129.044,108.575 ; -2.281,4.05 132.794,4.05 ; -1.031,22.05 135.519,22.05 ; 0.011,1.5 0.011,115.55 ; 3.844,106.125 131.394,106.125 ; 7.919,37.375 7.919,124.575 ; 11.525,-1.225 11.525,6.875 ; 14.389,13.05 127.369,13.05 ; 15.019,0.5 15.019,118.225 ; 27.781,5.65 27.781,119.7 ; 37.919,104.1 37.919,124.046 ; 44.969,92.323 100.044,92.323 ; 47.944,107.55 47.944,124.321 ; 64.969,-8.9 64.969,93.5 ; 64.969,93.225 64.969,126.65 ; 81.994,104.025 81.994,124.296 ; 90.919,-0.075 90.919,64.625 ; 91.994,104.3 91.994,124.171 ; 97.675,65.125 136.025,65.125 ; 115.031,-1.225 115.031,118.5 ; 121.994,31.425 121.994,123.925
  lines w0.5: 19.65,89.35 19.65,117.375

## Dimensions
107.075,21.23 to 115.05,21.055 on Mechanical1
118.55,1.675 to 130.075,-1.675 on Mechanical1
-8.475,0 to -6.8,4.975 on Mechanical1
56.437,63.376 to 51.112,103.351 on Mechanical1
81.994,124.296 to 91.994,124.1 on Mechanical1
47.944,124.55 to 37.919,123.675 on Mechanical1
47.944,126.625 to 64.969,125.1 on Mechanical1
64.969,126.65 to 81.994,125.125 on Mechanical1
122,123.175 to 64.966,123.225 on Mechanical1
130.719,106.1 to 130.569,116.1 on Mechanical1
0,0.375 to 15.019,0.5 on Mechanical1
0,2.125 to 11.525,-1.225 on Mechanical1
-2.806,0 to -2.4,120.05 on Mechanical1
0,-2.025 to 130.025,-3.25 on Mechanical1
96.123,89.775 to 46.123,87.35 on Mechanical1
115.031,-1.225 to 130.075,0.5 on Mechanical1
-3.575,0 to -1.581,4.05 on Mechanical1
-4.581,4.05 to -3.781,116.1 on Mechanical1
-1.725,108.575 to -0.925,120.05 on Mechanical1
0.794,4.075 to 0.745,22.05 on Mechanical1
0.011,115.55 to 64.969,126.65 on Mechanical1
64.966,123.254 to 7.925,123.2 on Mechanical1
132.88,40.085 to 134.305,106.11 on Mechanical1
130.129,104.774 to 118.1,111.325 on Mechanical1
11.975,110.825 to 0,111.75 on Mechanical1
134.519,40.1 to 136.025,65.125 on Mechanical1
137.07,19.175 to 138.05,60.175 on Mechanical1
108.075,64.7 to 130.071,63.925 on Mechanical1